# Altium PCB 3102_rev03.PcbDoc
Units mil, origin at the board's own origin, x right, y up, seen from the top; angles counter-clockwise.
Board outline 4150 x 4150 mil, 2 copper layers (Top Layer, Bottom Layer); 27 components, 29 nets, 102 pads, 0 vias.
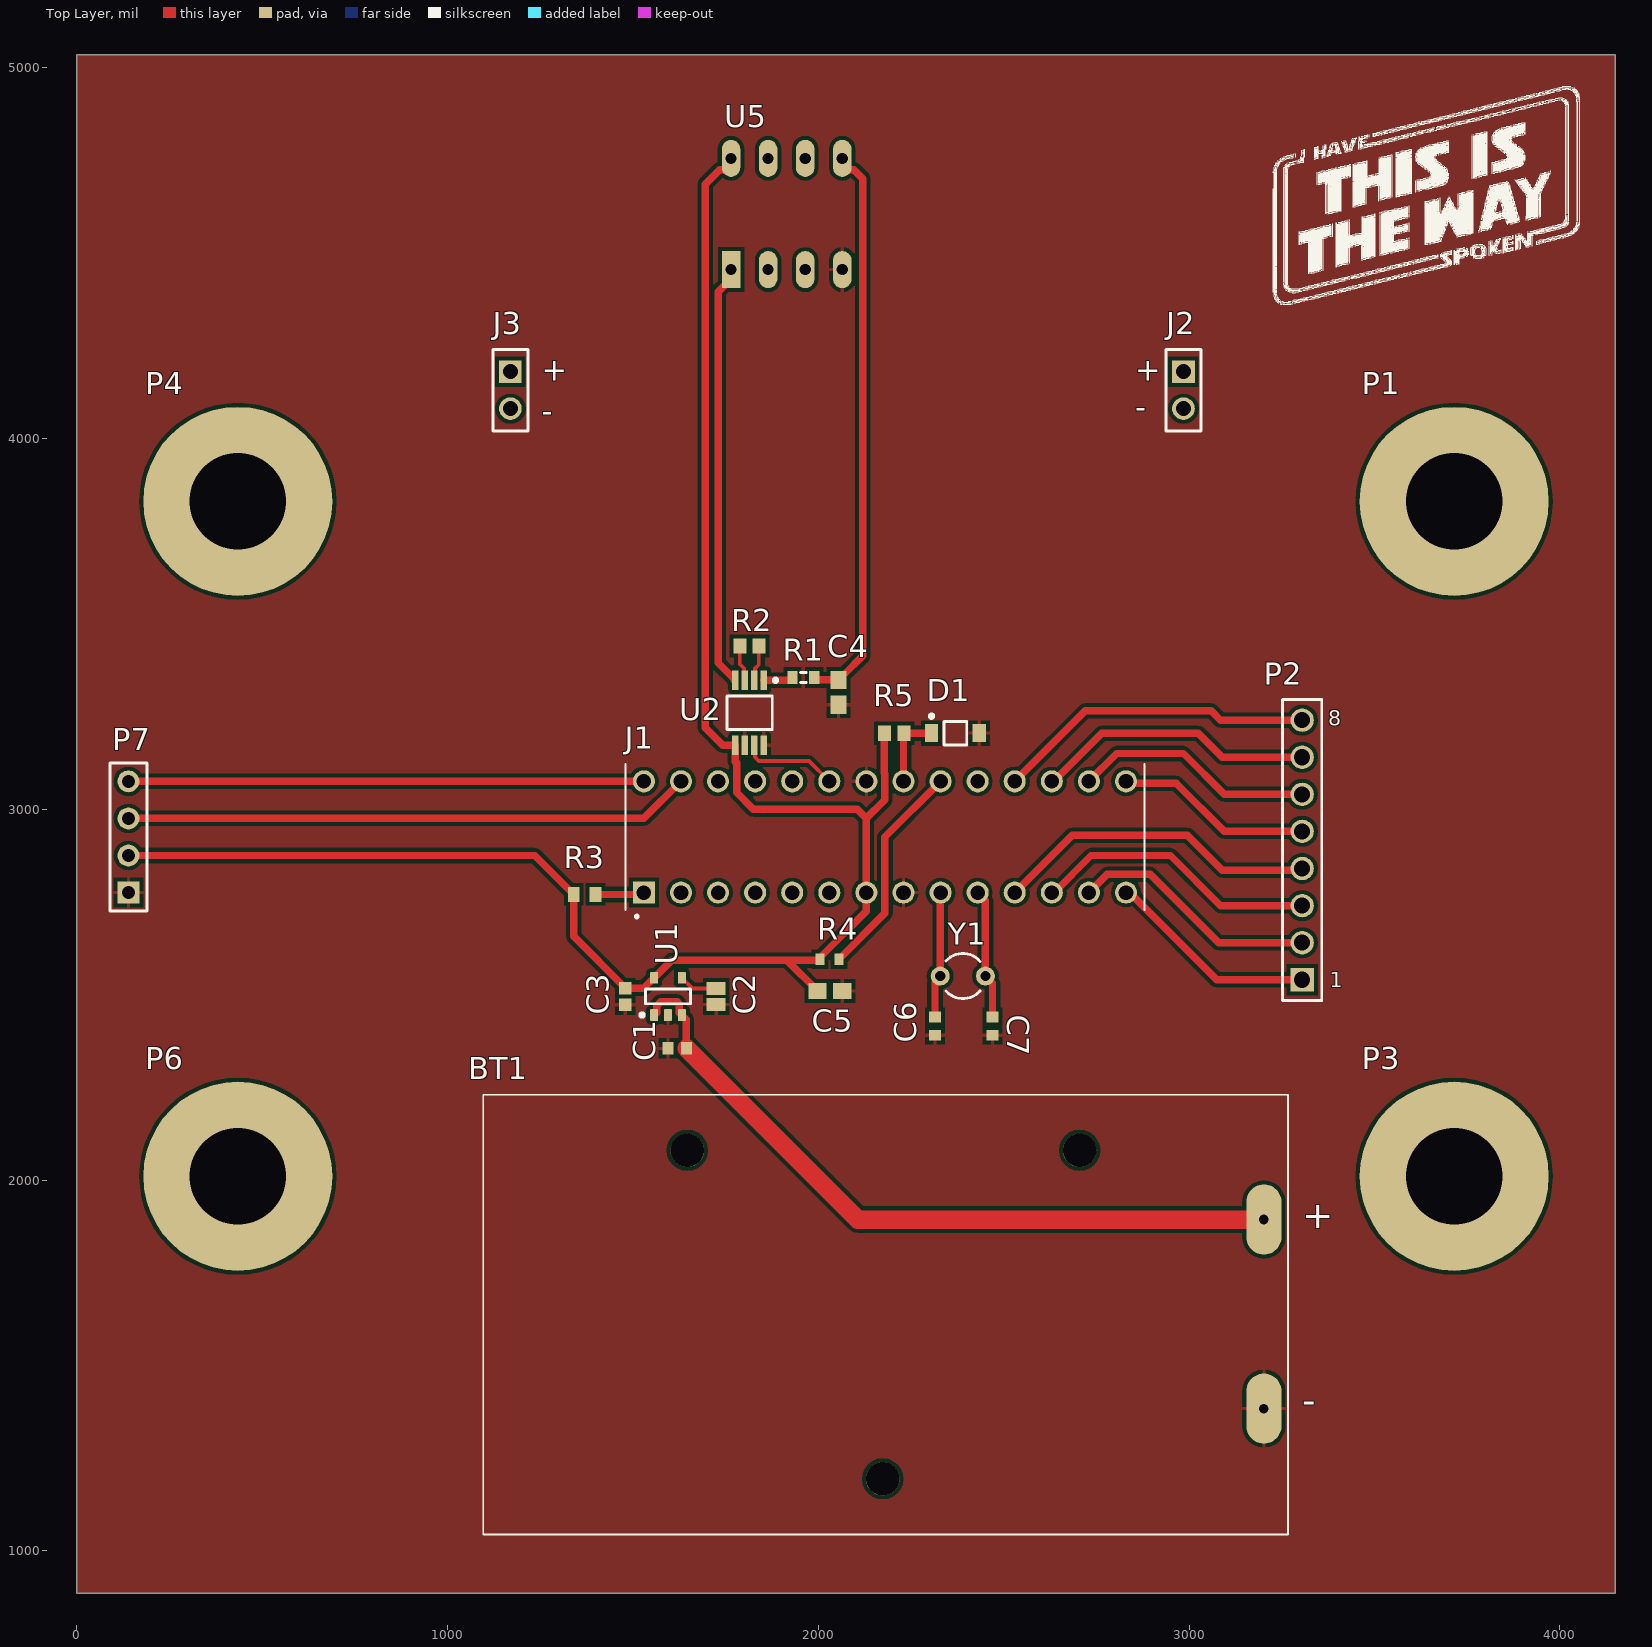
[diagram p0: Top Layer view]
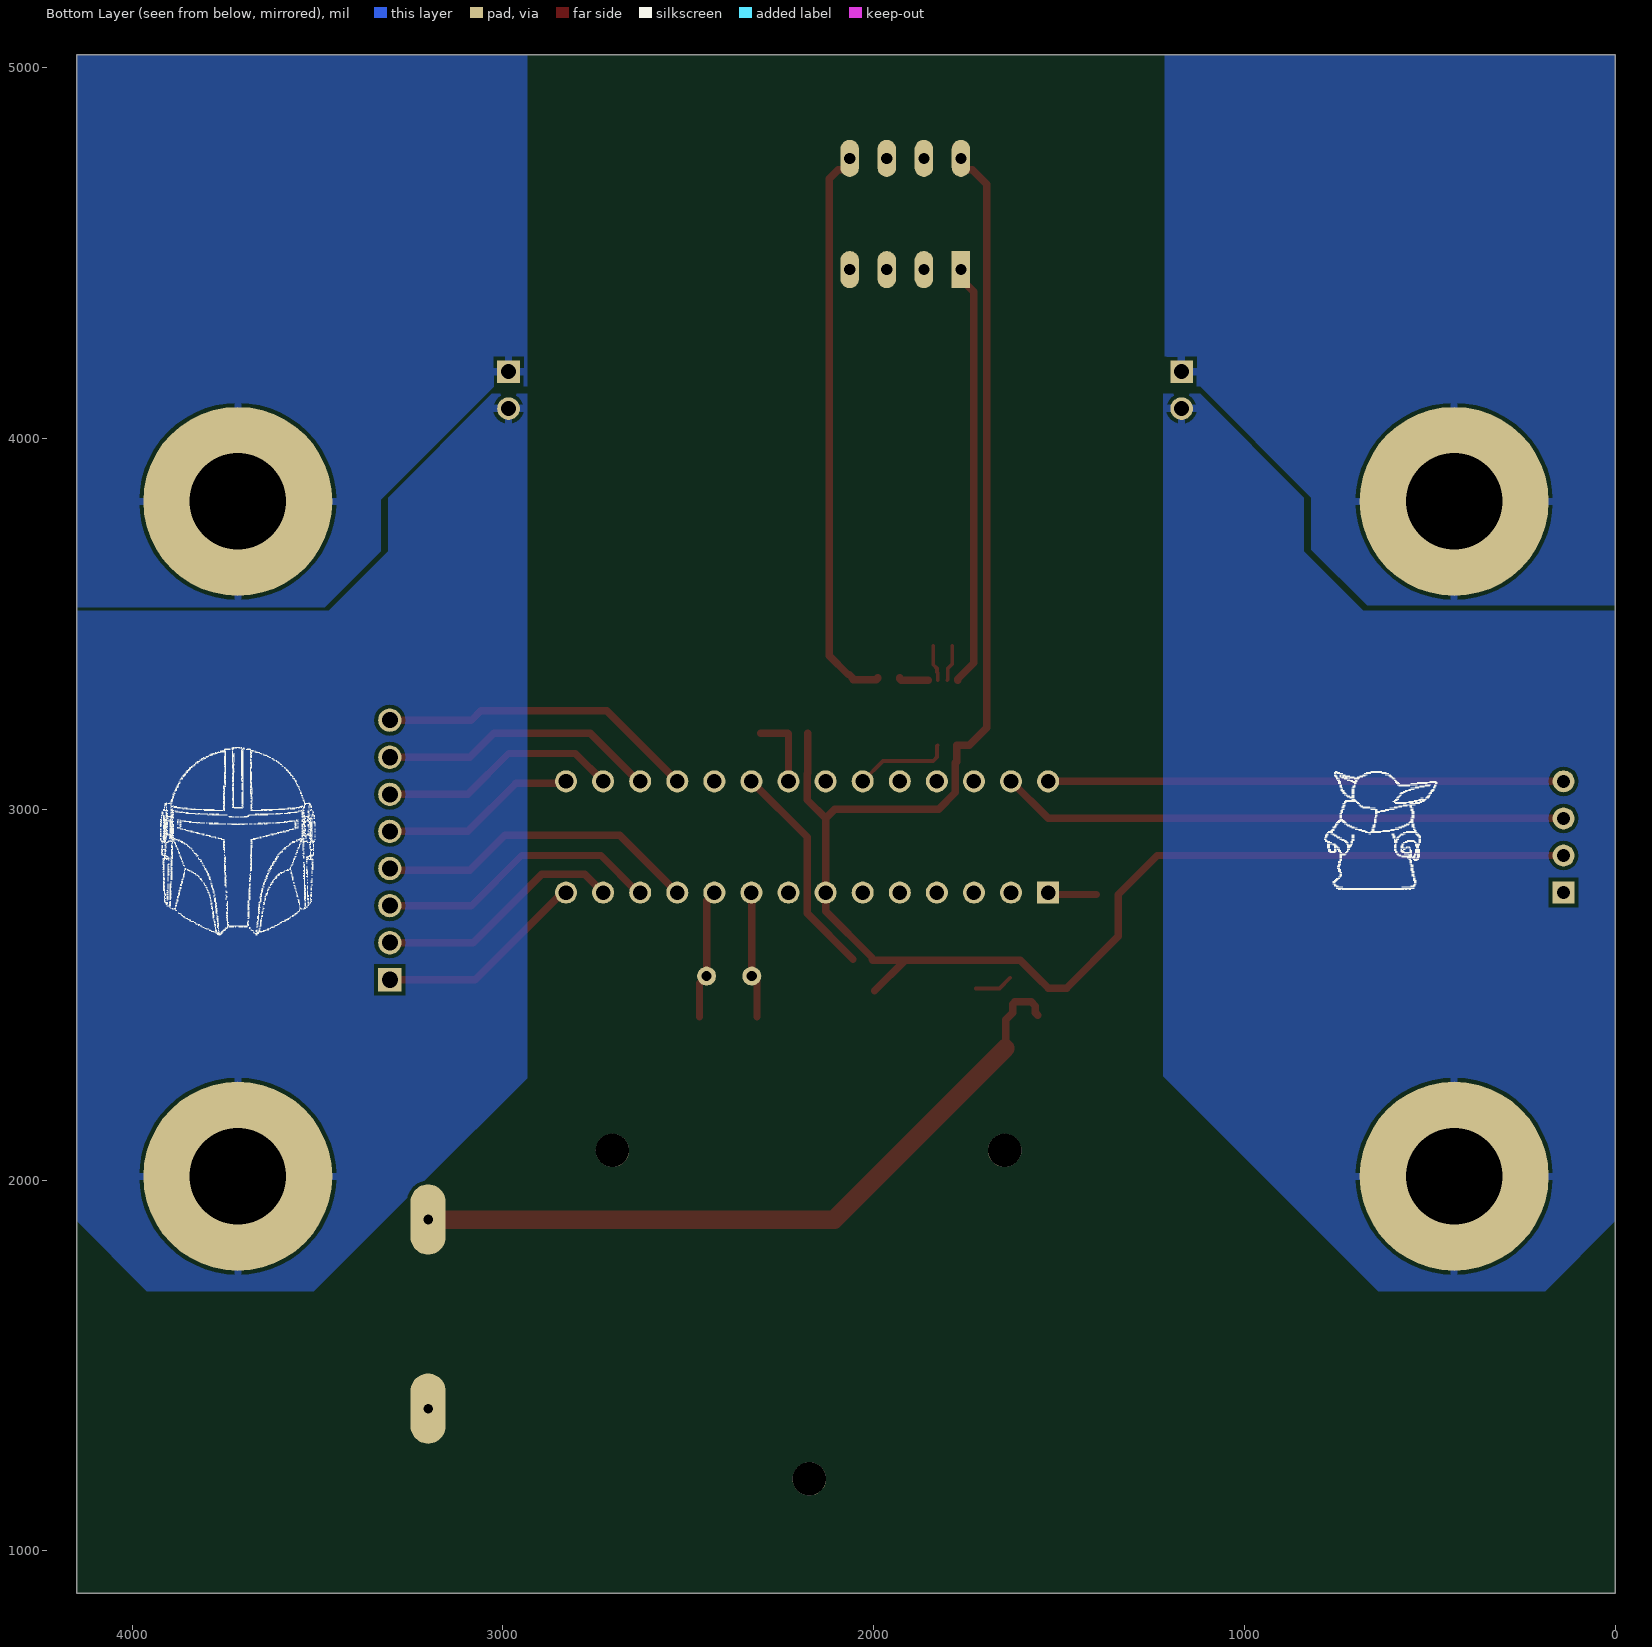
[diagram p1: Bottom Layer view, seen from below]

## Layer stack, top to bottom
Top Solder: solder mask 0.4, Solder Resist, Dk 3.5
Top Layer: signal copper 1.4
Dielectric 1: dielectric 12.6, FR-4, Dk 4.8
Bottom Layer: signal copper 1.4
Bottom Solder: solder mask 0.4, Solder Resist, Dk 3.5

## Board outline
0,885 0,5035 4150,5035 4150,885

## Design rules (kind name [scope] priority, off if disabled: settings)
Clearance [All] p1: gap=10 ignorepadtopadclearanceinfootprint=FALSE except(0: Arc-Hole Track-Hole SMDPad-Hole THPad-Hole Via-Hole Fill-Hole Poly-Hole Region-Hole Text-Hole)
PolygonConnect PolygonConnect_2 [All vs IsNamedPolygon('NETJ2_1_L02_P022') Or IsNamedPolygon('NETJ2_2_L02_P025') Or IsNamedPolygon('NETJ3_1_L02_P023') Or IsNamedPolygon('NETJ3_2_L02_P024')] p1: thpad.connectstyle=Relief thpad.reliefconductorwidth=20 thpad.reliefentries=4 thpad.polygonreliefangle="90 Angle" thpad.airgapwidth=10 smdpad.connectstyle=Relief smdpad.reliefconductorwidth=10 smdpad.reliefentries=4 smdpad.polygonreliefangle="90 Angle" smdpad.airgapwidth=10 via.connectstyle=Relief via.reliefconductorwidth=10 via.reliefentries=4 via.polygonreliefangle="90 Angle" via.airgapwidth=10
PolygonConnect PolygonConnect_1 [All vs IsNamedPolygon('NETJ3_2_L02_P024')] p2: thpad.connectstyle=Relief thpad.reliefconductorwidth=20 thpad.reliefentries=4 thpad.polygonreliefangle="90 Angle" thpad.airgapwidth=10 smdpad.connectstyle=Relief smdpad.reliefconductorwidth=10 smdpad.reliefentries=4 smdpad.polygonreliefangle="90 Angle" smdpad.airgapwidth=10 via.connectstyle=Relief via.reliefconductorwidth=10 via.reliefentries=4 via.polygonreliefangle="90 Angle" via.airgapwidth=10
PolygonConnect [All] p3: connectstyle=Relief reliefconductorwidth=10 reliefentries=4 polygonreliefangle="90 Angle" airgapwidth=10
RoutingVias [All] p1: holewidth=28 width=50 viastyle="Through Hole" minholewidth=28 minwidth=50 maxholewidth=28 maxwidth=50
SolderMaskExpansion [All] p1: expansion=4 istentingtop=FALSE
Width [All] p1: maxlimit=50 minlimit=10 preferedwidth=20 minimp=50.000000 maximp=50.000000 favimp=50.000000
30 further rules are at their usual default settings.

## Classes and differential pairs
component class ard_connector: C5 C6 C7 J1 P2 R3 R4 Y1
component class 3102_Sheet: BT1 C1 C2 C3 C4 D1 J2 J3 P1 P3 P4 P6 P7 R1 R2 R5 U1 U2 U5

## Components (designator, comment, footprint, x,y, rotation, side; value= is the part's Value field where it differs from the comment)
BT1 "BC9VPC" *BAT_BC9VPC_BC9VPC(Primary) 2705,2080 r0 top
C1 "1uF" CAPC1608X90X30LL10T20 1620,2355 r180 top
C2 "0.01uF" CAPC1613X90X50LL10T25 1725,2495 r90 top
C3 "CC0603KRX5R6BB225" CAPC1608X90X40LL10T20 1480,2495 r90 top
C4 "0603YG474ZAT2A" CAPC1608X90X35ML15T15 2055,3315 r90 top
C5 "0603YG474ZAT2A" CAPC1608X90X35ML15T15 2031.54,2510 r180 top
C6 "CL10C220JB8NNNC" CAPC1608X90X30LL10T20 2315,2415 r90 top
C7 "CL10C220JB8NNNC" CAPC1608X90X30LL10T20 2470,2415 r90 top
D1 "MMSZ4679T1G" ONSC-SOD-123-2-425-04_V 2370,3205 r0 top
J1 "1-2199298-9" *DIP762W60P254L3556H510Q28 2180,2925 r90 top
J2 "SSW-102-02-T-S" SMTC-SSW-102-02-X-S 2985,4180 r270 top
J3 "SSW-102-02-T-S" SMTC-SSW-102-02-X-S 1170,4180 r270 top
P1 "Model 1581 Red" "Banana Jack Footprint" 3715,3830 r0 top
P2 "61300811121" 61300811121 3305,2890 r90 top
P3 "Model 1581 Black" "Banana Jack Footprint" 3715,2010 r0 top
P4 "Model 1581 Red" "Banana Jack Footprint" 435,3830 r0 top
P6 "Model 1581 Black" "Banana Jack Footprint" 435,2010 r0 top
P7 "I2C Connector" HDR1X4 140,2775 r90 top
R1 "Res3" J1-0603 1960,3355 r0 top
R2 "ERA3AEB2492V" RESC1608X55X30NL20T20 1814.41,3440 r180 top
R3 "RT0603DRE0710KL" RESC1608X55X25ML10T15 1370,2770 r0 top
R4 "RT0603BRD0711KL" RESC1608X55X25LL10T15 2030.59,2595 r180 top
R5 "CRCW06032K70FKEA" RESC1609X50X30ML10T20 2205,3205 r0 top
U1 "LP2985IM5-5.0/NOPB" DBV0005A_L 1595,2495 r90 top
U2 "INA826AIDGKR" DGK0008A_N 1815,3260 r270 top
U5 "SOIC-8 Breakout Connector" "SOIC-8 Breakout Board" 1765,4455 r90 top
Y1 "XTAL" R38 2390,2550 r90 top

## Footprints (in the part's own frame and the unit in brackets; to place one, negate y for a bottom-side part, rotate by r counter-clockwise, add the part's x,y. Pads: shape width x height; smd on the part's side, far side on the other; paste and mask are expansions set on the pad)
61300811121 [mm] "Pin Header, pitch 2.54 mm, THT, Vertical, single row, 8p"
  rect 1.6x1.6 hole 1.1: 1(-8.89,0)
  round 1.6 hole 1.1: 2(-6.35,0) 3(-3.81,0) 4(-1.27,0) 5(1.27,0) 6(3.81,0) 7(6.35,0) 8(8.89,0)
  silkscreen extent -10.31,-1.35 10.31,1.35, body extent -10.16,-1.27 10.16,1.27, height 8.57
*BAT_BC9VPC_BC9VPC(Primary) [mm]
  oval 2.41x4.82 hole 0.66: N(12.62,-17.69) P(12.62,-4.74)
  round 2.29 hole 2.29 unplated: None(-26.87,0) None(-13.49,-22.5) None(0,0)
  silkscreen extent -40.85,-26.31 14.27,3.81
*DIP762W60P254L3556H510Q28 [mm]
  rect 1.508x1.508 hole 1: 1(-3.81,16.51)
  round 1.508 hole 1: 2(-3.81,13.97) 3(-3.81,11.43) 4(-3.81,8.89) 5(-3.81,6.35) 6(-3.81,3.81) 7(-3.81,1.27) 8(-3.81,-1.27) 9(-3.81,-3.81) 10(-3.81,-6.35) 11(-3.81,-8.89) 12(-3.81,-11.43) 13(-3.81,-13.97) 14(-3.81,-16.51) 15(3.81,-16.51) 16(3.81,-13.97) 17(3.81,-11.43) 18(3.81,-8.89) 19(3.81,-6.35) 20(3.81,-3.81) 21(3.81,-1.27) 22(3.81,1.27) 23(3.81,3.81) 24(3.81,6.35) 25(3.81,8.89) 26(3.81,11.43) 27(3.81,13.97) 28(3.81,16.51)
  silkscreen extent -5.55,-17.78 5,17.78
"Banana Jack Footprint" [mil]
  round 510 hole 260: 1(0,0)
CAPC1608X90X30LL10T20 [mm] "Chip Capacitor, 2-Leads, Body 1.70x0.90mm, IPC High Density"
  rect 0.75x0.85 smd: 1(-0.625,0) 2(0.625,0)
  body extent -0.85,-0.45 0.85,0.45, height 0.9
CAPC1608X90X35ML15T15 [mm] "Chip Capacitor, 2-Leads, Body 1.60x0.81mm, IPC Low Density"
  rect 1.25x1.1 smd: 1(-0.85,0) 2(0.85,0)
  body extent -0.88,-0.48 0.87,0.48, height 0.9
CAPC1608X90X40LL10T20 [mm] "Chip Capacitor, 2-Leads, Body 1.70x0.90mm, IPC High Density"
  rect 0.85x0.85 smd: 1(-0.575,0) 2(0.575,0)
  body extent -0.85,-0.45 0.85,0.45, height 0.9
CAPC1613X90X50LL10T25 [mm] "Chip Capacitor, 2-Leads, Body 1.60x1.25mm, IPC High Density"
  rect 0.9x1.3 smd: 1(-0.55,0) 2(0.55,0)
  body extent -0.85,-0.67 0.85,0.68, height 0.9
DBV0005A_L [mm] "SOT23, 5-Leads, Body 3.05x1.75mm, Pitch 0.95mm, IPC High Density"
  rrect18% 0.8x0.55 smd: 1(-1.275,0.95) 2(-1.275,0) 3(-1.275,-0.95) 4(1.275,-0.95) 5(1.275,0.95)
  silkscreen extent -1.4,-1.55 0.5,1.9, body extent -1.42,-1.46 1.42,1.46, height 1.08
DGK0008A_N [mm] "TSOP, 8-Leads, Body 3.1x3.1mm, Pitch 0.65mm, IPC Medium Density"
  rrect22% 1.35x0.45 smd: 1(-2.225,0.975) 2(-2.225,0.325) 3(-2.225,-0.325) 4(-2.225,-0.975) 5(2.225,-0.975) 6(2.225,-0.325) 7(2.225,0.325) 8(2.225,0.975)
  silkscreen extent -2.35,-1.55 1.15,1.9, body extent -2.45,-1.5 2.45,1.5, height 0.94
HDR1X4 [mm] "Connector; Header; 4 Position"
  rect 1.5x1.5 hole 0.9: 1(0,0)
  round 1.5 hole 0.9: 2(2.54,0) 3(5.08,0) 4(7.62,0)
  silkscreen extent -1.27,-1.27 8.89,1.27
J1-0603 [mm] "Chip Resistor, Body 1.6x0.8mm, IPC High Density"
  rect 0.7x0.9 smd: 1(-0.75,0) 2(0.75,0)
  silkscreen extent -0.2,-0.35 0.2,0.35, body extent -0.85,-0.48 0.85,0.48, height 0.9
ONSC-SOD-123-2-425-04_V [mm] "SOD, 2-Leads, Body 2.69x1.6mm"
  rect 0.91x1.22 smd: 1(-1.635,0) 2(1.635,0)
  silkscreen extent -1.76,-0.8 0.78,1.28, body extent -1.35,-0.8 1.35,0.8, height 1.35
R38 [mm] "Crystal, Thru-Hole; 2 Leads; Body 3.1 x 8.2 mm (Dia.xH)"
  round 1.3 hole 0.7: 1(0,1.55) 2(0,-1.55)
  silkscreen extent -1.55,-1.19 1.55,1.17
RESC1608X55X25LL10T15 [mm] "Chip Resistor, 2-Leads, Body 1.60x0.80mm, IPC High Density"
  rect 0.6x0.8 smd: 1(-0.65,0) 2(0.65,0)
  body extent -0.85,-0.45 0.85,0.45, height 0.55
RESC1608X55X25ML10T15 [mm] "Chip Resistor, 2-Leads, Body 1.60x0.80mm, IPC Low Density"
  rect 0.8x1 smd: 1(-0.75,0) 2(0.75,0)
  body extent -0.85,-0.45 0.85,0.45, height 0.55
RESC1608X55X30NL20T20 [mm] "Chip Resistor, 2-Leads, Body 1.60x0.80mm, IPC Medium Density"
  rect 0.9x1 smd: 1(-0.65,0) 2(0.65,0)
  body extent -0.9,-0.5 0.9,0.5, height 0.55
RESC1609X50X30ML10T20 [mm] "Chip Resistor, 2-Leads, Body 1.55x0.85mm, IPC Low Density"
  rect 0.9x1.05 smd: 1(-0.675,0) 2(0.675,0)
  body extent -0.82,-0.48 0.82,0.48, height 0.5
SMTC-SSW-102-02-X-S [mm] "SQ Post Socket, 1x2 Pins, Vertical, 2.54mm Pitch, Female"
  rect 1.55x1.55 hole 1.04: 1(0,0)
  round 1.55 hole 1.04: 2(2.54,0)
  silkscreen extent -1.53,-1.2 4.07,1.2, body extent -1.52,-1.21 4.06,1.21, height 8.51
"SOIC-8 Breakout Board" [mil]
  rect 100x50 hole 30: 1(0,0)
  oval 100x50 hole 30: 2(0,-100) 3(0,-200) 4(0,-300) 5(300,-300) 6(300,-200) 7(300,-100) 8(300,0)

## Part data
BT1: "BATTERY HOLDER 9V PC PIN", Manufacturer="Memory Protection Devices", Package=None, Package Quantity=100, Supplier Part Number 1=BC9VPC-ND, Availability=Unavailable, Category="Batteries and Accessories", ComponentLink1Description=https://datasheet.ciiva.com/3/bc9vpc-datasheet-3861.pdf?src-supplier=Digi-Key, ComponentLink1URL=https://datasheet.ciiva.com/3/bc9vpc-datasheet-3861.pdf?src-supplier=Digi-Key, Lead Free="Lead Free", Manufacturer Part Number=BC9VPC, MF=MPD, Mount="Through Hole,PCB", MP=BC9VPC, Number of Cells=1, Price=None, Pricing 1="1=1.98000, 10=1.67100, 100=1.38390, 500=1.19462, 1000=1.11629 (USD)", RoHS=Yes, SnapEDA_Link=https://www.snapeda.com/parts/BC9VPC/MPD/view-part/4389071/?ref=snap, Stock 1=16110, Supplier 1=Digi-Key, Termination="PC Pin"
C1: library part CMP-2000-06093-1, "Chip Capacitor, 1 uF, +/- 10%, 16 V, -55 to 125 degC, 0603 (1608 Metric), RoHS, Tape and Reel", Capacitance=1000000pF, Case Size/Dimension=0603, Dielectric=X7R, Manufacturer="Samsung Electro-Mechanics", Package Description="2-Pin Surface Mount Device, Body 1.60 x 0.80 mm", Rated Voltage=16V, Tolerance (%)=±10%, Datasheet URL=http://www.samsungsem.com/kr/support/product-search/mlcc/__icsFiles/afieldfile/2016/08/18/S_CL10B105KO8NNNC.pdf, Datasheet Version=07/2016, Manufacturer URL=http://www.samsungsem.com/global/index.jsp, Mounting Technology=SurfaceMount, Package Reference=0603
C2: library part CMP-2006-02215-1, Manufacturer=Yageo, Part Number=CC0603KPX7R9BB103
C3: library part CMP-2000-06073-1, "Chip Capacitor, 2.2 uF, +/- 10%, 10 V, -55 to 85 degC, 0603 (1608 Metric), RoHS, Tape and Reel, CC0603KRX5R6BB225", Capacitance=2.2µF, Manufacturer=Yageo, Operating Temperature=-55°C~85°C, Package / Case=0603(1608Metric), Package Description="2-Pin Surface Mount Device, Body 1.6 x 0.8 mm", Package Reference=0603, Ratings=-, Standard Package=1, Temperature Coefficient=X5R, Tolerance=±10%, Voltage - Rated=10V, Applications=GeneralPurpose, Category=Capacitors, Datasheet URL=http://www.yageo.com/documents/recent/UPY-GPHC_X5R_4V-to-50V-21.pdf, Datasheet Version="Rev. 21, 01/2016", Family=CeramicCapacitors, Featured Product=Yageo-HighCapacitanceMLCC, Features=-, Height - Seated (Max)=-, Lead Spacing=-, Lead Style=-, Manufacturer URL=http://www.yageo.com/, Mounting Technology=SurfaceMount, Mounting Type=SurfaceMount,MLCC, Online Catalog=CCSeries, Other Names=311-1451-6, Packaging=Digi-Reel®, Series=CC, Size / Dimension="0.063\"Lx0.031\"W(1.60mmx0.80mm)", Thickness (Max)="0.035\"(0.90mm)"
C4 C5: library part CMP-2006-04546-1, Manufacturer="AVX Interconnect / Elco", Part Number=0603YG474ZAT2A
C6 C7: library part CMP-2000-06101-1, "Chip Capacitor, 22 pF, +/- 5%, 50 V, -55 to 125 degC, 0603 (1608 Metric), RoHS, Tape and Reel", Capacitance=22pF, Case Size/Dimension=0603, Dielectric=C0G, Manufacturer="Samsung Electro-Mechanics", Package Description="2-Pin Surface Mount Device, Body 1.60 x 0.80 mm", Rated Voltage=50V, Tolerance (%)=±5%, Datasheet URL=http://www.samsungsem.com/kr/support/product-search/mlcc/__icsFiles/afieldfile/2016/08/18/S_CL10C220JB8NNNC.pdf, Datasheet Version=06/2016, Manufacturer URL=http://www.samsungsem.com/global/index.jsp, Mounting Technology=SurfaceMount, Package Reference=0603
D1: library part CMP-1060-00509-1, "Zener Voltage Regulator, 500 mW, 2-Pin SOD-123, Pb-Free, Tape and Reel", Manufacturer="On Semiconductor", ComponentLink1Description="Manufacturer URL", ComponentLink1URL=http://www.onsemi.com/, ComponentLink2Description=Datasheet, ComponentLink2URL=http://www.onsemi.com/pub_link/Collateral/MMSZ4678T1-D.PDF, ComponentLink3Description="Package Specification", ComponentLink3URL=http://www.onsemi.com/pub_link/Collateral/425-04.PDF, DatasheetVersion="Rev. 9", Mounting Technology="Surface Mount", P Max (W)=0.5, PackageDescription="2-Pin SOD, Body 1.6 x 2.69 mm", PackageReference=SOD-123-2-425-04, PackageVersion="Rev. G, 10/2009", Packing="Tape and Reel", PartNumber=MMSZ4679T1G, RoHS=Pb-Free, VZ Typ (V)=2
J1: "CONN IC DIP SOCKET 28POS TIN", Color=Black, Contact Current Rating=1A, Flammability Rating="UL94 V-0", Insulation Resistance=1GR, Manufacturer="TE Connectivity", Max Operating Temperature=105°C, Min Operating Temperature=-40°C, Package="PDIP-28 TE Connectivity", Package Quantity=17, Supplier Part Number 1=A120353-ND, Category="IC and Component Sockets", Centerline_Pitch="2.54 mm[.1 in]", ComponentLink1Description=https://www.distrelec.biz/Web/Downloads/_t/ds/1-2199298-9_eng_tds.pdf?mime=application%2Fpdf&src-supplier=Distrelec, ComponentLink1URL=https://www.distrelec.biz/Web/Downloads/_t/ds/1-2199298-9_eng_tds.pdf?mime=application%2Fpdf&src-supplier=Distrelec, ComponentLink2Description=http://www.te.com/commerce/DocumentDelivery/DDEController?Action=showdoc&DocId=Customer+Drawing%7F2199298%7FA%7Fpdf%7FEnglish%7FENG_CD_2199298_A_baseFilename.pdf&src-supplier=Avnet, ComponentLink2URL=http://www.te.com/commerce/DocumentDelivery/DDEController?Action=showdoc&DocId=Customer+Drawing%7F2199298%7FA%7Fpdf%7FEnglish%7FENG_CD_2199298_A_baseFilename.pdf&src-supplier=Avnet, ComponentLink3Description=https://www.te.com/commerce/DocumentDelivery/DDEController?Action=srchrtrv&DocNm=2199298&DocType=Customer+Drawing&DocLang=English&src-supplier=Digi-Key, ComponentLink3URL=https://www.te.com/commerce/DocumentDelivery/DDEController?Action=srchrtrv&DocNm=2199298&DocType=Customer+Drawing&DocLang=English&src-supplier=Digi-Key, Connector Type=Pin, Contact Material=Bronze, Contact Plating=Tin, Contact Post Length=3inch, Current Rating=1A, Digi-Key_Part_Number=A120353-ND, Digi-Key_Purchase_URL=https://www.digikey.com/product-detail/en/te-connectivity-amp-connectors/1-2199298-9/A120353-ND/5022045?utm_source=snapeda&utm_medium=aggregator&utm_campaign=symbol, ELV=Compliant, EU_RoHS_Compliance=Compliant, Housing Material=PBT, Insulation Material=Thermoplastic, Length=1.4inch, Manufacturer Part Number=1-2199298-9, Mating Alignment="Yes (With)", MF="TE Connectivity", Mount="Through Hole", MP=1-2199298-9, Number_of_Positions=28, Number of Contacts=28, Number of Poles=28, Number of Positions=28, Number of Rows=2, Orientation=Straight, Packaging=Rail/Tube, Pitch=2.54mm, Pricing 1="1=0.73000, 10=0.68600, 25=0.61760, 50=0.54920, 100=0.52630, 250=0.48052, 500=0.45762, 1000=0.37754, 2500=0.34322 (USD)", Product_Type=Socket, Radiation Hardening=No, REACH SVHC=Unknown, RoHS=Yes, Row Spacing=0.3inch, SnapEDA_Link=https://www.snapeda.com/parts/1-2199298-9/TE%20Connectivity%20AMP%20Connectors/view-part/1265789/?ref=snap, Stock 1=4877, Supplier 1=Digi-Key, TE_purchase_URL=https://www.te.com/usa-en/product-1-2199298-9.html?te_bu=Cor&te_type=disp&te_campaign=seda_glo_cor-seda-global-disp-prtnr-fy19-seda-model-bom-cta_sma-317_1&elqCampaignId=32493, Termination="Through Hole"
J2 J3: library part CMP-1023-00323-1, "SQ Post Socket, Through-hole, Vertical, -55 to 105 degC, 2.54 mm Pitch, 2-Pin, Female, RoHS", Manufacturer=Samtec, Temperature Range="-55 to 105 degC", ComponentLink1Description="Manufacturer URL", ComponentLink1URL=http://www.samtec.com, ComponentLink2Description=Datasheet, ComponentLink2URL=http://www.samtec.com/documents/webfiles/pdf/SSW_TH.PDF, ComponentLink3Description="Package Specification", ComponentLink3URL=http://www.samtec.com/documents/webfiles/cpdf/SSW-1XX-XX-XXX-X-XX-XXX-XX-MKT.pdf, DatasheetVersion=F-214, Mounting Technology=Through-hole, Orientation=Vertical, PackageDescription="Assembly, Socket Strip .016 X .031 Tail", PackageReference=SSW-102-02-X-S, PackageVersion="CA, 6/1987", PartNumber=SSW-102-02-T-S, Pitch="2.54 mm", RoHS=True
P1 P4: library part "Banana Plug", "Pomona Model 1581", Supplier Part Number 1=501-1083-ND, Supplier 1=Digi-Key
P2: library part CMP-1502-01076-1, "THT Vertical Pin Header WR-PHD, Pitch 2.54 mm, Single Row, 8 pins", Contact Resistance=20mOhm, Manufacturer="Wurth Elektronik", Operating Temperature=-40to105degC, Rated Current=3A, Withstanding Voltage=500VAC, Working Voltage=250VAC, Datasheet URL=https://katalog.we-online.de/em/datasheet/6130xx11121.pdf, Gender=Male, Manufacturer URL=http://www.we-online.de, Mounting Technology=THT, Orientation=Vertical, Package Reference=61300811121, Packaging=Bag, Part Number=61300811121, Pin Number=8, Pitch=2.54mm, Publisher=WurthElektronik, Row Number=Single
P3 P6: library part "Banana Plug", "Pomona Model 1581", Supplier Part Number 1=501-1078-ND, Supplier 1=Digi-Key
P7: "SAMTEC - TSW-104-08-G-S - HEADER, 2.54MM, THT VERT, 4WAY", Color=Black, Manufacturer=Samtec, Manufacturer Part Number=TSW-104-08-G-S, Max Current Rating=7.6A, Max Operating Temperature=125°C, Max Voltage Rating (AC)=550V, Min Operating Temperature=-55°C, Package Quantity=1, Supplier Part Number 1=SAM1038-04-ND, Category="Headers and Wire Housings", ComponentLink1Description=https://datasheet.ciiva.com/6888/tsw-xxx-xx-xxx-x-xx-xxx-mkt-6888927.pdf?src-supplier=Digi-Key, ComponentLink1URL=https://datasheet.ciiva.com/6888/tsw-xxx-xx-xxx-x-xx-xxx-mkt-6888927.pdf?src-supplier=Digi-Key, ComponentLink2Description=https://datasheet.ciiva.com/10190/htsw-th-10190315.pdf?src-supplier=Avnet, ComponentLink2URL=https://datasheet.ciiva.com/10190/htsw-th-10190315.pdf?src-supplier=Avnet, Connector Type="Male Pin", Contact Material=Bronze, Contact Mating Length=0.23inch, Contact Plating=Gold, Depth=2.54mm, Gender=Male, Housing Color=Black, Housing Material=Polyester, Lead Free="Lead Free", Length=10.16mm, Number of Contacts=4, Number of Positions=4, Number of Rows=1, Orientation=Vertical, Packaging=Bulk, Pitch=2.54mm, Pricing 1="1=0.45000, 10=0.41800, 25=0.37600, 50=0.33400, 100=0.32020, 250=0.29232, 500=0.27840 (USD)", Radiation Hardening=No, REACH SVHC="No SVHC", RoHS=Yes, Stock 1=884, Supplier 1=Digi-Key, Termination=Solder, Width=2.54mm
R1: library part CMP-2000-04350-1, Manufacturer=Yageo, Part Number=RT0603BRD0711KL
R2: library part CMP-2000-03181-1, "CRCW06032K67FKEA", Manufacturer="Vishay Dale", Part Number=CRCW06032K67FKEA
R3: library part CMP-2000-04608-1, Manufacturer=Yageo, Part Number=RT0603DRE0710KL
R4: library part CMP-2000-04350-1, Manufacturer=Yageo, Part Number=RT0603BRD0711KL
R5: library part CMP-2000-03182-1, Manufacturer="Vishay Dale", Part Number=CRCW06032K70FKEA
U1: library part CMP-0062-02017-3, "Micropower 150 mA Low-Noise Ultra Low-Dropout Regulator, 5-pin SOT-23, Pb-Free", Manufacturer="Texas Instruments", PackageTopMarking=L0UB*XTT, PowerWise=N, ComponentLink1Description="Datasheet URL", ComponentLink1URL=http://www.ti.com/general/docs/lit/getliterature.tsp?genericPartNumber=LP2985-N&fileType=pdf, CompType="LDO IC", PackageDescription="Molded SOT-23, .115 x .063 x .040 in Body, 5 Lead, .0375 in Pitch", PackageReference=DBV0005A, PinCount=5, RoHS=Y
U2: library part CMP-0944-00060-2, "Precision, 200-uA Supply Current, 36-V Supply Instrumentation Amplifier, -40 to 125 degC, 8-pin SOP (DGK8), Green (RoHS & no Sb/Br)", Input Bias Current (+/-)(Max)(nA)=65, Manufacturer="Texas Instruments", Quiescent Current (+/-)(Typ)(mA)=0.2, CMRR(Min)(dB)=84, Code_JEDEC=MO-187, ComponentLink1Description="Manufacturer URL", ComponentLink1URL=http://www.ti.com/, ComponentLink2Description=Datasheet, ComponentLink2URL=http://www.ti.com/general/docs/lit/getliterature.tsp?genericPartNumber=INA826&fileType=pdf, ComponentLink3Description="Package Specification", ComponentLink3URL=http://www.ti.com/litv/pdf/mpds028d, DatasheetVersion=SBOS562E, Eco-Plan="Green (RoHS & no Sb/Br)", Gain(V/V)="1 to 1000", Input Offset (+/-)(Max)(uV)=150, Input Offset Drift (+/-)(Max)(uV/Degrees Celsius)=2, Mounting Technology="Surface Mount", Noise at 1kHz(Typ)(nV/rt(Hz))=18, Non-Linearity (+/-)(Max)(%)=0.0005, Number of Channels=1, Output Offset (+/-)(Max)(uV)=700, Output Offset Drift (+/-)(Max)(uV/Degrees Celsius)=10, PackageDescription="8-Pin Thin Small Outline, Body 3 x 3 mm, Pitch 0.65 mm", PackageReference=DGK0008A, PackageVersion="4073329/E, 05/2006", PartNumber=INA826AIDGKR, SubFamily="Single Supply", Vs(Max)(V)=36, Vs(Min)(V)=2.7
U5: Supplier Part Number 1=A880AR-ND, Supplier 1=Digi-Key
Y1: "CRYSTAL 16.000MHZ 20PF THRU", Case/Package=Metal, ESR (Equivalent Series Resistance)=30R, Frequency=16MHz, Frequency Stability=50ppm, Load Capacitance=20pF, Manufacturer=TXC, Manufacturer Part Number=9B-16.000MBBK-B, Max Operating Temperature=70°C, Min Operating Temperature=-20°C, Package Quantity=1000, Supplier Part Number 1=887-2015-ND, Category=Crystals, ComponentLink1Description=https://datasheet.ciiva.com/6733/9b-6733741.pdf?src-supplier=Digi-Key, ComponentLink1URL=https://datasheet.ciiva.com/6733/9b-6733741.pdf?src-supplier=Digi-Key, Depth=5mm, Frequency Tolerance=50ppm, Height=0.145inch, LatestRevisionDate=17-Jul-2002, LatestRevisionNote="Re-released for DXP Platform.", Length=0.453inch, Mount="Through Hole", Number of Pins=2, PackageDescription="Crystal, Thru-Hole; 2 Leads; Body 3.1 x 8.2 mm (Dia.xH)", PackageReference=R38, Packaging=Bulk, Pricing 1="1=0.30000, 10=0.25000, 50=0.22500, 100=0.20000, 500=0.19000, 1000=0.16000, 2500=0.15000, 5000=0.14500, 10000=0.14000 (USD)", Published=8-Jun-2000, Publisher="Altium Limited", RoHS=Yes, Stock 1=2492, Supplier 1=Digi-Key, Width=0.197inch

## Nets (pads, with @x,y where several pads share a name; then routed paths per layer and width w, separated by ;. In a path a pad name is that pad's centre, name@x,y a point inside that pad or via, vN(x,y) a via of type N, cw(c..) or ccw(c..) an arc to the next point about the centre after c; other vN are vias at no path point)
9V: BT1.P C1.1 U1.1 U1.3 | length 1980.2
  Top Layer w10: U1.1 U1.1@1557.6,2454.05
  Top Layer w20: U1.1 1564.17,2451.38 1564.17,2469.17 1575.55,2480.55 1619.45,2480.55 1620,2480 1620,2479.35 1625.83,2473.52 1625.83,2451.38 U1.3 1644.61,2432.6 C1.1
  Top Layer w50: C1.1@1645.16,2355 2106.77,1893.39 BT1.P
ADC0: J1.23 U2.7 | length 260.2
  Top Layer w10: U2.7 1829.53,3170.67 1829.53,3140.47 1840,3130 1975,3130 J1.23
AREF: D1.1 J1.21 R5.2 | length 204.7
  Top Layer w20: J1.21 2230,3203.43 R5.2 D1.1
AVCC: J1.20 R4.1 | length 593.4
  Top Layer w20: R4.1 2180,2718.82 2180,2925 J1.20
GND: BT1.N C1.2 C2.1 C3.1 C4.1 C5.1 C6.1 C7.1 D1.2 J1.8 J1.22 P7.1 U1.2 U2.6 U2.8 U5.4
NetC2_2: C2.2 U1.4 | length 104.4
  Top Layer w10: U1.4 1660.94,2516.65 C2.2
NetC4_2: C4.2 R1.2 U5.5 | length 1537.7
  Top Layer w20: R1.2 1989.53,3352.24 1993.31,3348.46 C4.2 2055,3351.42 2066.65,3363.07 2069.61,3363.07 2120,3413.46 2120,4700 2095.74,4724.26 2078.86,4724.26 2065,4738.12 U5.5
NetJ2_1: J2.1 P1.1
NetJ2_2: J2.2 P3.1
NetJ3_1: J3.1 P4.1
NetJ3_2: J3.2 P6.1
NetR1_1: R1.1 U2.1 | length 82.3
  Top Layer w20: U2.1 1926.69,3347.6 1930.47,3351.38 R1.1
NetR2_1: R2.1 U2.2 | length 97.5
  Top Layer w10: U2.2 1827.8,3367.44 1829.53,3369.17 1829.53,3379.24 1840,3389.72 R2.1
NetR2_2: R2.2 U2.3 | length 97.9
  Top Layer w10: R2.2 1788.82,3390.9 1800.47,3379.24 1800.47,3349.33 U2.3
NetU2_4: U2.4 U5.1 | length 1139.9
  Top Layer w20: U5.1 1765,4430 1730,4395 1730,3394.21 1773.35,3350.87 U2.4@1773.35,3347.6
"Pin 1": J1.18 P2.8 | length 864.1
  Top Layer w20: J1.18 2720,3265 3060,3265 3085,3240 P2.8
"Pin 2": J1.17 P2.7 | length 755.8
  Top Layer w20: J1.17 2635,3075 2765,3205 3025,3205 3090,3140 P2.7
"Pin 3": J1.16 P2.6 | length 651.6
  Top Layer w20: J1.16 2805,3150 2985,3150 3095,3040 P2.6
"Pin 4": J1.15 P2.5 | length 530.9
  Top Layer w20: J1.15 2835,3070 2965,3070 3095,2940 P2.5
"Pin 5": J1.11 P2.4 | length 880.6
  Top Layer w20: J1.11 2685,2930 2995,2930 3090,2835 3300,2835 P2.4
"Pin 6": J1.12 P2.3 | length 772.3
  Top Layer w20: J1.12 2635.74,2775 2735.74,2875 2950,2875 3085,2740 P2.3
"Pin 7": J1.13 P2.2 | length 672.3
  Top Layer w20: J1.13 2780,2825 2895,2825 3080,2640 P2.2
"Pin 8": J1.14 P2.1 | length 572.3
  Top Layer w20: J1.14 2840,2775 3075,2540 P2.1
RESET: J1.1 R3.2 | length 132.5
  Top Layer w20: R3.2 1525,2770 J1.1
SCL: J1.28 P7.4 | length 1390
  Top Layer w20: P7.4 J1.28
SDA: J1.27 P7.3 | length 1531.4
  Top Layer w20: P7.3 1530,2975 J1.27
VCC: C3.2 C5.2 J1.7 P7.2 R3.1 R4.2 R5.1 U1.5 U2.5 U5.8 | length 5127.8
  Top Layer w20: P7.2 1235.47,2875 R3.1 1340.47,2657.17 C3.2 1530.04,2517.64 U1.5 1605.47,2593.07 1915,2593.07 ; U2.5@1773.35,3172.4 1742.6,3172.4 1695,3220 1695,4685 1734.26,4724.26 1751.14,4724.26 1765,4738.12 U5.8 1765,4771.88 U5.8@1778.86,4785.74 ; U2.5 1776.61,3128.39 1780,3125 1780,3045 1825,3000 2105,3000 2130,2975 ; C5.2 1915,2593.07 ; R5.1 2178.43,3096.84 2179.69,3095.58 2179.69,3024.69 2130,2975 ; 1915,2593.07 2003.07,2593.07 R4.2 2005,2600 2130,2725 J1.7 2130,2975
XTAL1: C6.2 J1.9 Y1.1 | length 341.6
  Top Layer w20: C6.2 2315,2536.02 Y1.1 2328.98,2773.98 J1.9
XTAL2: C7.2 J1.10 Y1.2 | length 352
  Top Layer w20: J1.10 2451.02,2753.98 Y1.2 2470,2531.02 C7.2
pads on no net: BT1.None J1.2 J1.3 J1.4 J1.5 J1.6 J1.19 J1.24 J1.25 J1.26 U5.2 U5.3 U5.6 U5.7

## Polygon pours and split planes (outlines as drawn)
GND on Top Layer "GND_L01_P016" (solid, remove dead copper, pour order 16): 0,885 4150,885 4150,5035 0,5035
GND on Top Layer "Top Layer-GND 1" (solid, pour order 14): 1005,4335
GND on Top Layer "Top Layer-GND 2" (solid, pour order 6): 760,2335
no net on Top Layer "Top Layer-No Net" (solid, pour order 2): 3700,2865
NetJ2_2 on Bottom Layer "NETJ2_2_L02_P025" (solid, pour order 25): 3030,4120 3310,3840 3310,3695 3470,3535 4150,3535 4150,1890 3960,1700 3510,1700 2935,2275 2935,4120
NetJ3_2 on Bottom Layer "NETJ3_2_L02_P024" (solid, pour order 24): 1120,4120 840,3840 840,3695 680,3535 0,3535 0,1890 190,1700 640,1700 1220,2280 1220,4120
NetJ3_1 on Bottom Layer "NETJ3_1_L02_P023" (solid, pour order 23): 0,5035 1215,5035 1215,4140 1120,4140 820,3840 820,3700 670,3550 0,3550
NetJ2_1 on Bottom Layer "NETJ2_1_L02_P022" (solid, pour order 22): 4150,5035 2935,5035 2935,4140 3025,4140 3330,3835 3330,3695 3480,3545 4150,3545

## Silkscreen, mask and mechanical layers (free items; w line width, h text height)
Top Overlay:
  drawing of 6650 lines, arcs and shapes, not listed
  text "+" at 1255,4155 h60
  text "+" at 2855,4155 h60
  text "-" at 2855,4055.01 h60
  text "-" at 1255,4045.01 h60
Bottom Overlay:
  drawing of 2836 lines, arcs and shapes, not listed

## Text inside footprints (layer, text, board x,y; h text height)
BT1: Top Overlay "+" at 3305,1870.16 h73.82; Top Overlay "-" at 3305,1370.16 h73.82; Mechanical 4 "+" at 3305,1870.16 h73.82; Mechanical 4 "-" at 3305,1370.16 h73.82; Mechanical 4 "+" at 3305,1870.16 h73.82; Mechanical 4 "-" at 3305,1370.16 h73.82
P2: Top Overlay "8" at 3375,3225 h40; Top Overlay "1" at 3380,2520 h40